# EAGLE board HVIB (EAGLE 9.1.3)
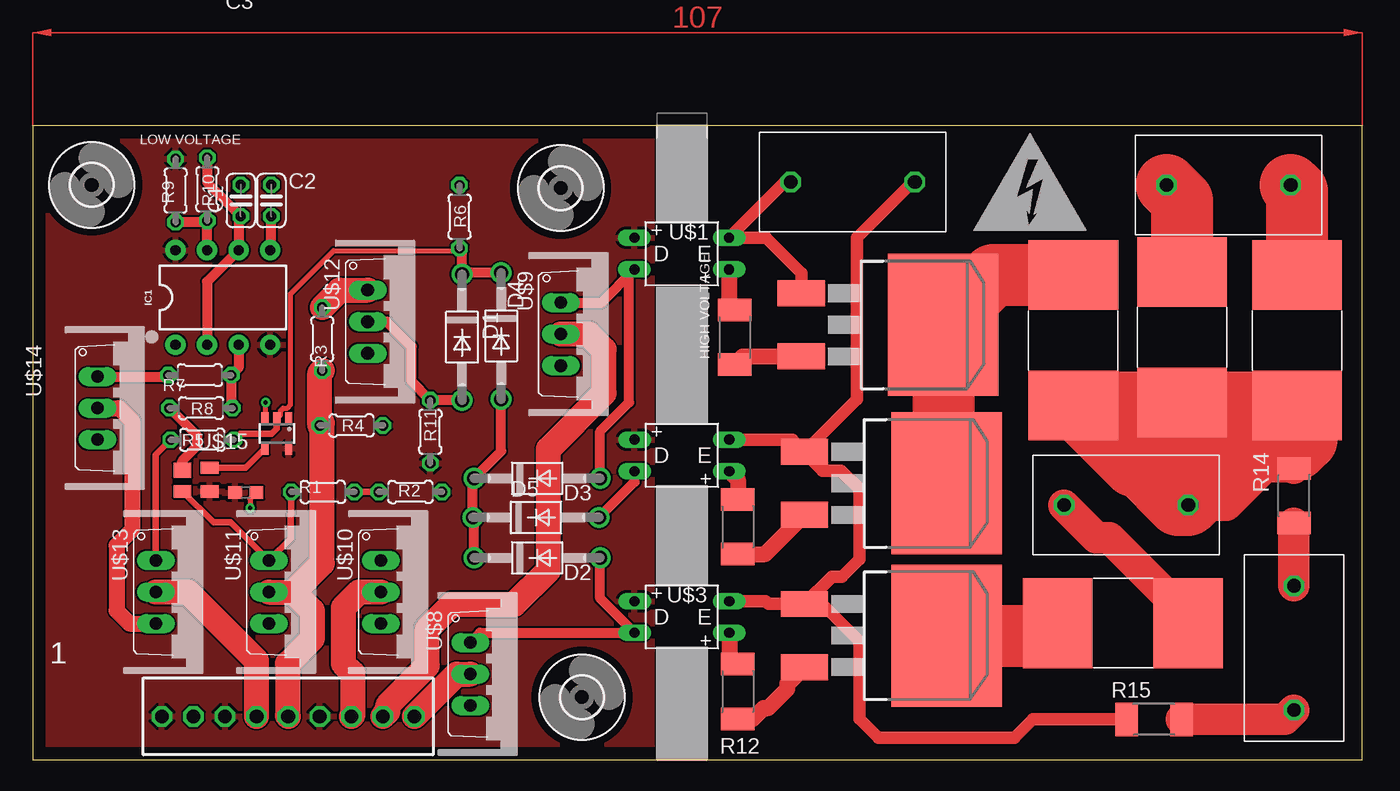
[diagram p0: board, top side]
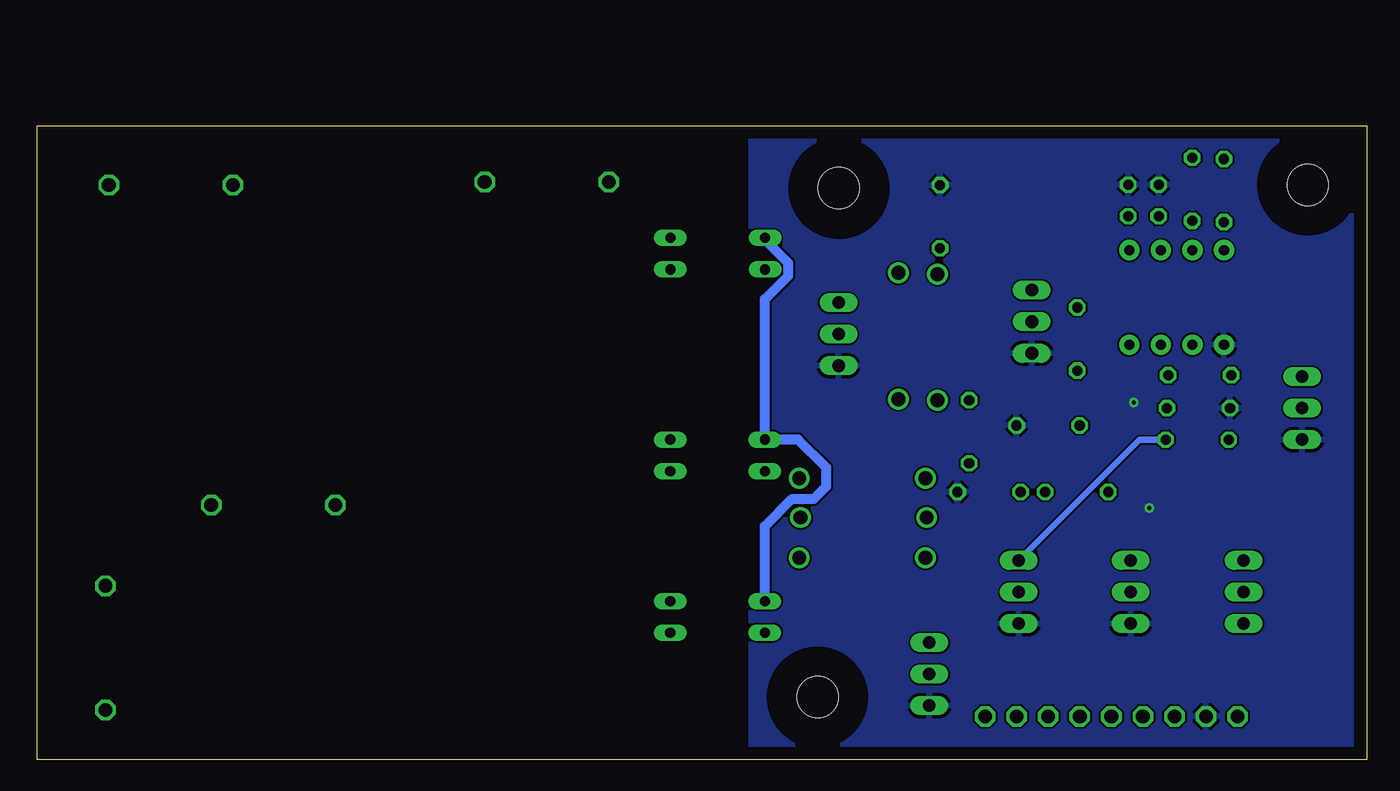
[diagram p1: board, bottom side, seen from below]

Size 107 x 51 mm. Coordinates in mm from the lower left corner, seen from the top.
Outline: 0,0 107,0 107,51 0,51 0,0
Copper layers (1*16): Top 0.035mm / dielectric 1.5mm / Bottom 0.035mm
Design rules "default": minimum track width 6mil, minimum drill 0.35mm, track to track 6mil, track to pad 6mil, pad to pad 6mil, via to via 6mil, smd to smd 6mil, copper to edge 40mil, drill to drill 6mil, minimum pad ring 10mil, minimum via ring 8mil, stop-mask expansion 4mil, vias tented up to drill 0mil, thermal gap 10mil
Net classes: 0 LV: width 0.2 mm, drill 0.15 mm, clearance 0.152 mm; 1 HV: width 0.5 mm, drill 0.15 mm, clearance 2 mm
tRestrict: area 50.2,0 to 54.2,51
bRestrict: area 50.2,0 to 54.2,51

## Footprints (pad centres in the part's own frame; a part is rotated, then mirrored left to right if it is on the bottom)
_CUSTOM_PARTS_LF_885 = smd 5.6 x 7.23: P$1 5.25,0; P$2 -5.25,0
C025-024X044 = drill 0.813 octagon: 1 -1.27,0; 2 1.27,0
C0603 = smd 1.1 x 1: 1 -0.85,0; 2 0.85,0
DO41-10 = drill 1.118: A 5.08,0; C -5.08,0
3,3 = hole 3.3: 0,0
DIP08 = drill 0.813 pad 1.626: 1 -3.81,-3.81; 2 -1.27,-3.81; 3 1.27,-3.81; 4 3.81,-3.81; 5 3.81,3.81; 6 1.27,3.81; 7 -1.27,3.81; 8 -3.81,3.81
0204/5 = drill 0.813 octagon: 1 -2.54,0; 2 2.54,0
R2010 = smd 1.8 x 2.7: 1 -2.2,0; 2 2.2,0
DIL04 = drill 0.813 long: 1 -1.27,-3.81; 2 1.27,-3.81; 3 1.27,3.81; 4 -1.27,3.81
D2PACK = smd 2.083 x 3.81: 1 -2.54,-8.89; 3 2.54,-8.89 | smd 11.43 x 8.89: 2 0,2.54
DCDC_PARTS_282838-2_FOOT = drill 1.1 octagon: P$1 0,0; P$2 10,0
1725724_FOOT = drill 1.1 octagon: P$1 0,0; P$2 2.54,0; P$3 5.08,0; P$4 7.62,0; P$5 10.16,0; P$6 12.7,0; P$7 15.24,0; P$8 17.78,0; P$9 20.32,0
TO220V = drill 1.016 long: 1 -2.54,-2.54; 2 0,-2.54; 3 2.54,-2.54
SSOT6 = smd 0.6 x 1: 1 -0.95,-1.2; 2 0,-1.2; 3 0.95,-1.2; 4 0.95,1.2; 5 -0.95,1.2
MIC4416YM4-TR = smd 1 x 1.44: CTL 0,0; GATE 1.9,-2.2; VS 1.9,0 | smd 1.2 x 1.44: GND 0.2,-2.2

## Placement (x,y rotation side)
1A_500V_FUSE_ENERGYMETER  _CUSTOM_PARTS_LF_885  [_CUSTOM_PARTS_LF_885]  101.75,33.75 270 top
1A_500V_FUSE_IMD_VSENSE  _CUSTOM_PARTS_LF_885  [_CUSTOM_PARTS_LF_885]  92.5,34 270 top
C1  39n  [C025-024X044]  16.75,45 90 top
C2  10n  [C025-024X044]  19.2,45 90 top
C3  100n  [C0603]  17.15,21.5 0 top
D1  1N4004  [DO41-10]  34.55,34 270 top
D2  1N4004  [DO41-10]  40.6,16.25 0 top
D3  1N4004  [DO41-10]  40.6,22.65 0 top
D4  1N4004  [DO41-10]  37.7,34.1 270 top
D5  1N4004  [DO41-10]  40.5,19.5 0 top
H1  MOUNT-HOLE3.3  [3,3]  4.75,46.25 0 top
H2  MOUNT-HOLE3.3  [3,3]  42.5,46 0 top
H4  MOUNT-HOLE3.3  [3,3]  44.2,5.05 0 top
HV+_FUSE_DRY  _CUSTOM_PARTS_LF_885  [_CUSTOM_PARTS_LF_885]  83.75,33.75 90 top
HV+_FUSE_WET  _CUSTOM_PARTS_LF_885  [_CUSTOM_PARTS_LF_885]  87.75,11 180 top
IC1  555  [DIP08]  15.3,37.2 0 top
R1  100  [0204/5]  23.35,21.55 180 top
R2  1M  [0204/5]  30.4,21.55 180 top
R3  100  [0204/5]  23.3,33.85 90 top
R4  1M  [0204/5]  25.65,26.9 180 top
R5  100  [0204/5]  13.65,25.75 180 top
R6  1M  [0204/5]  34.35,43.7 270 top
R7  100  [0204/5]  13.45,30.95 180 top
R8  1M  [0204/5]  13.55,28.3 0 top
R9  2.2k  [0204/5]  11.5,45.8 90 top
R10  4.7M  [0204/5]  14.05,45.9 270 top
R11  1M  [0204/5]  32,26.4 270 top
R12  [R2010]  56.75,5.5 270 top
R13  [R2010]  56.5,34 270 top
R14  25k  [R2010]  101.5,21.25 90 top
R15  25k  [R2010]  90.25,3.25 180 top
R16  [R2010]  56.75,18.75 270 top
U$1  OPI7002  [DIL04]  52.24,40.72 90 top
U$2  IXCY10M90S  [D2PACK]  71,10 270 top
U$3  OPI7002  [DIL04]  52.25,11.5 90 top
U$4  DCDC_PARTS_282838-2_TE  [DCDC_PARTS_282838-2_FOOT]  71,46.5 180 top
U$5  IXCY10M90S  [D2PACK]  70.75,35 270 top
U$6  DCDC_PARTS_282838-2_TE  [DCDC_PARTS_282838-2_FOOT]  83,20.5 0 top
U$7  PHOENIX_1725724  [1725724_FOOT]  10.4,3.5 0 top
U$8  N_CH_MOSFET_VERT  [TO220V]  37.75,6.9 270 top
U$9  N_CH_MOSFET_VERT  [TO220V]  45.05,34.25 270 top
U$10  N_CH_MOSFET_VERT  [TO220V]  30.55,13.5 270 top
U$11  N_CH_MOSFET_VERT  [TO220V]  21.55,13.5 270 top
U$12  N_CH_MOSFET_VERT  [TO220V]  29.5,35.25 270 top
U$13  N_CH_MOSFET_VERT  [TO220V]  12.45,13.5 270 top
U$14  N_CH_MOSFET_VERT  [TO220V]  7.75,28.3 270 top
U$15  ROHM_INVERTER  [SSOT6]  19.65,26.25 180 top
U$16  DCDC_PARTS_282838-2_TE  [DCDC_PARTS_282838-2_FOOT]  101.5,4 90 top
U$17  DCDC_PARTS_282838-2_TE  [DCDC_PARTS_282838-2_FOOT]  101.25,46.25 180 top
U$18  OPI7002  [DIL04]  52.25,24.5 90 top
U$19  IXCY10M90S  [D2PACK]  71,22.25 270 top
U$20  MIC4416YM4-TR  [MIC4416YM4-TR]  14.25,23.5 270 top

## Library data of the parts
1A_500V_FUSE_ENERGYMETER 1A_500V_FUSE_IMD_VSENSE HV+_FUSE_DRY HV+_FUSE_WET U$1-U$6 U$16-U$19 = _CUSTOM
C1-C3 = rcl; SPICEPREFIX: C
D1-D5 = diode
H1 H2 H4 = holes
IC1 = SparkFun-IC-Special-Function; PROD_ID: IC-09173; PROD_ID_ALT: IC-09173
R1-R16 = rcl; SPICEPREFIX: R
U$7-U$15 = 111_Custom
U$20 = PDM_2019_RevB

## Nets
+12V: C3.1 IC1.4 IC1.8 R9.2 R11.2 U$1.3 U$3.3 U$7.P$1 U$7.P$3 U$7.P$6 U$15.5 U$18.3 U$20.VS
ACC_LGHT: U$7.P$7 U$10.2
AIR+_ACTIVE: D3.A U$1.4 U$9.1
AIR+_LGHT_GND: U$7.P$8 U$9.2
AIR+_ON [HV]: R13.2 U$5.3
AIR-_ACTIVE: D2.A U$3.4 U$8.1
AIR-_LGHT_GND: U$7.P$9 U$8.2
AIR-_ON [HV]: R12.2 U$2.3
AIR_ON: D1.C D4.C R5.1 R6.2 U$10.1 U$15.2
GND: C1.2 C2.2 C3.2 IC1.1 R2.1 R4.1 R6.1 R8.1 U$7.P$2 U$8.3 U$9.3 U$10.3 U$11.3 U$12.3 U$14.3 U$15.3 U$20.GND
HV+_DRY [HV]: 1A_500V_FUSE_ENERGYMETER.P$1 1A_500V_FUSE_IMD_VSENSE.P$1 HV+_FUSE_DRY.P$2 R14.2 U$6.P$2
HV+_DRY_FUSED: HV+_FUSE_DRY.P$1 U$5.2 U$19.2
HV+_WET [HV]: HV+_FUSE_WET.P$2 U$6.P$1
HV+_WET_FUSED: HV+_FUSE_WET.P$1 U$2.2
HV-_DRY [HV]: R15.2 U$2.1 U$3.2 U$4.P$1 U$18.2 U$19.1
HV-_WET [HV]: U$1.2 U$4.P$2 U$5.1
N$1: R1.1 R2.2
N$2: R1.2 U$11.1 U$20.GATE
N$3: R3.2 U$12.1
N$4: C2.1 IC1.5
N$5: IC1.7 R9.1 R10.2
N$6: R5.2 U$13.1
N$7: R7.2 U$14.1
N$8: IC1.3 R7.1 R8.2
N$9: C1.1 IC1.2 IC1.6 R10.1
N$10 [HV]: R12.1 U$3.1
N$11: U$15.4 U$20.CTL
N$12 [HV]: R13.1 U$1.1
N$13: U$13.3 U$14.2
N$14: D2.C D3.C D4.A D5.C
N$15: D1.A R11.1 U$12.2
N$16: R16.2 U$19.3
N$17: R14.1 U$16.P$2
N$18: 1A_500V_FUSE_IMD_VSENSE.P$2 U$17.P$2
N$19 [HV]: 1A_500V_FUSE_ENERGYMETER.P$2 U$17.P$1
N$20: R15.1 U$16.P$1
N$22: R16.1 U$18.1
N$23: D5.A U$18.4
TSAL_GRN_GND: R3.1 R4.2 U$7.P$5 U$11.2
TSAL_RED_GND: U$7.P$4 U$13.2

## Tracks (layer width: path | path; a pad name or v marks a point on that pad's centre or on a via)
+12V
  Bottom 0.813: U$3.3 48.44,18.81 46.25,21 44.5,21 43.5,22 43.5,23.5 45.77,25.77 U$18.3 48.44,37.05 46.55,38.95 46.55,39.95 48.44,41.84 U$1.3
  pour Top: -1.9,53.1 49.8,53.1 49.8,-2 -1.9,-2
ACC_LGHT
  Top 2: U$10.2 26.25,13.5 25,12.25 25,7.75 25.75,7 25.75,3.61 U$7.P$7
AIR+_ACTIVE
  Top 0.813: D3.A 45.68,26.43 48,28.75 48,39.02 U$1.4 45.77,36.79 U$9.1
AIR+_LGHT_GND
  Top 2: U$7.P$8 28.57,3.89 28.57,4.39 31.75,7.57 31.75,10.5 33.75,12.5 38.75,12.5 41.5,15.25 41.5,25 46,29.5 46,33 44.75,34.25 U$9.2
AIR+_ON
  Top 1.27: U$5.3 57.16,32.46 R13.2
AIR-_ACTIVE
  Top 0.813: U$8.1 36,10.23 U$3.4 45.68,12.99 D2.A
AIR-_LGHT_GND
  Top 2: U$7.P$9 34.12,6.9 U$8.2
AIR-_ON
  Top 1.27: R12.2 57.95,3.3 58.81,4.17 59.19,4.17 60.73,5.71 60.73,6.08 U$2.3
AIR_ON
  Top 0.406: U$15.2 19.94,27.74 19.94,28.1 20.15,28.31 20.51,28.31 20.75,28.55 20.75,37.5 24.21,40.96 34.55,40.96
  Top 0.508: R5.1 16.69,26.25 19.25,26.25 19.65,26.65 U$15.2
  Top 0.813: D4.C 34.65,39.18 D1.C 34.55,40.96 R6.2
  Bottom 0.508: U$10.1 18.3,25.75 R5.1
GND  (via drill 0.35)
  Top 0.406: C3.2 17.5,21 v17.5,20.25 | U$15.3 18.75,27.5 v18.75,28.75
  Top 0.813: U$20.GND 12.05,24.05 13.25,25.25 13.25,26.06 R8.1
  pour Bottom: -1,51.9 49.55,51.9 49.55,-2 -1,-2
HV+_DRY
  Top 2.54: 102.25,28 1A_500V_FUSE_ENERGYMETER.P$1 | R14.2 101.5,23.59 | 101.5,23.59 101.5,28.75 | U$6.P$2 96.08,20.5 99.17,23.59 101.5,23.59
  Top 5: 101.5,28.75 102.25,28 | 1A_500V_FUSE_IMD_VSENSE.P$1 84,28.75 HV+_FUSE_DRY.P$2 88.59,23.66 89.04,23.66 92.2,20.5 U$6.P$2 | 1A_500V_FUSE_IMD_VSENSE.P$1 101.5,28.75 | U$6.P$2 101.25,28.75 101.5,28.75 | U$6.P$2 93,28.25 1A_500V_FUSE_IMD_VSENSE.P$1 | 1A_500V_FUSE_IMD_VSENSE.P$1 92.5,27.5 90,25 101.75,25 102.5,25.75
HV+_DRY_FUSED
  Top 5: HV+_FUSE_DRY.P$1 77.29,39 U$5.2 73.29,22.5 U$19.2
HV+_WET
  Top 2.54: U$6.P$1 85.61,17.89 86.65,17.89 92.25,12.29 92.25,10.75 92.5,11 HV+_FUSE_WET.P$2
HV+_WET_FUSED
  Top 5: U$2.2 81.5,10 HV+_FUSE_WET.P$1
HV-_DRY
  Top 1.016: U$3.2 58.98,12.77 59.21,12.54 U$2.1 | U$18.2 61.13,25.77 U$19.1 | U$19.1 62.11,24.7 63.55,23.26 65.05,23.26 66.52,21.79 66.52,16.13 65.14,14.75 64.32,14.75 U$2.1 | R15.2 80.5,3.25 79.02,1.78 68.06,1.78 66.52,3.31 66.52,9.54 63.52,12.54 U$2.1 | U$19.1 66.34,29.02 66.34,42 70.83,46.5 U$4.P$1
HV-_WET
  Top 1.016: U$4.P$2 60.56,46.5 U$1.2 59.01,41.99 61.86,39.14 U$5.1
N$1
  Top 0.508: R1.1 R2.2
N$2
  Top 0.508: R1.2 20.81,19.81 20.75,19.75 20.75,17.78 U$11.1 15.95,19.1 14.55,19.1 U$20.GATE
N$3
  Top 2: R3.2 24.7,37.79 U$12.1
N$4
  Top 0.813: IC1.5 19.2,41.1 C2.1
N$5
  Top 0.813: IC1.7 14.03,43.34 R10.2 13.95,43.26 R9.1
N$6
  Top 0.508: U$13.1 9.91,24.55 R5.2
N$7
  Top 0.813: U$14.1 10.8,30.84 R7.2
N$8
  Top 0.813: IC1.3 16.57,31.53 R7.1 15.99,28.4 R8.2
N$9
  Top 0.813: R10.1 14.05,46.43 C1.1 16.57,43.55 IC1.6 14.03,38.47 IC1.2
N$10
  Top 1.27: U$3.1 56.06,8.39 R12.1
N$11
  Top 0.508: U$15.4 17.15,23.5 U$20.CTL
N$12
  Top 1.27: U$1.1 56.05,36.65 R13.1
N$13
  Top 1.27: U$14.2 6.95,28.3 8,27.25 8,18.5 6.75,17.25 6.75,12 7.79,10.96 U$13.3
N$14
  Top 0.813: D2.C 35.52,19.4 D5.C 35.42,22.55 D3.C 37.7,24.83 D4.A
N$15
  Top 0.813: D1.A 32.02,28.92 R11.1 30.5,30.44 30.5,33.25 28.5,35.25 U$12.2
N$16
  Top 1.27: R16.2 58.95,16.55 U$19.3
N$17
  Top 2.54: R14.1 U$16.P$2
N$18
  Top 5: U$17.P$2 92.5,45 1A_500V_FUSE_IMD_VSENSE.P$2
N$19
  Top 5: U$17.P$1 101.75,45.75 1A_500V_FUSE_ENERGYMETER.P$2
N$20
  Top 2.54: R15.1 100.75,3.25 U$16.P$1
N$22
  Top 1.27: U$18.1 56.75,22.54 R16.1
N$23
  Top 0.813: D5.A 48.44,22.36 U$18.4
TSAL_GRN_GND
  Top 0.813: 23.3,27.09 R4.2
  Top 2: 21,13.5 22.5,12 22.5,9.75 20.5,7.75 20.5,3.56 U$7.P$5 | U$11.2 21,13.5 | 21,13.5 23.3,15.8 23.3,27.09 | R4.2 23.11,31.12 R3.1
TSAL_RED_GND
  Top 2: U$7.P$4 18.02,7.98 12.5,13.5 U$13.2
(copper drawn outside any net)
  shapes: Top area x1

## Text on the board
tPlace: LOW VOLTAGE | HIGH VOLTAGE | 10 - HV+ WET / 11 - HV + DRY / 12 - HV - DRY / 13 - HV - WET / 14 - E METER VSENSE / 15 - IMD VSENSE / 16 - TSMP+ / 17 - TSMP- | 1 | 1 - +12V / 2 - GND / 3 - TSAL FLASH / 4 - TSAL GREEN / 5 - TSAL GND / 6 - AMS+ / 7 - AMS- / 8 - AIR- ON / 9 - AIR+ ON